# Altium PCB ltk-hall-main.PcbDoc
Units mm, origin at the board's own origin, x right, y up, seen from the top; angles counter-clockwise.
Board outline 100 x 100 mm, 2 copper layers (Top Layer, Bottom Layer), stack 1.56 mm thick; 114 components, 91 nets, 428 pads, 0 vias.
Unrouted connection lines stored in the file: 294.
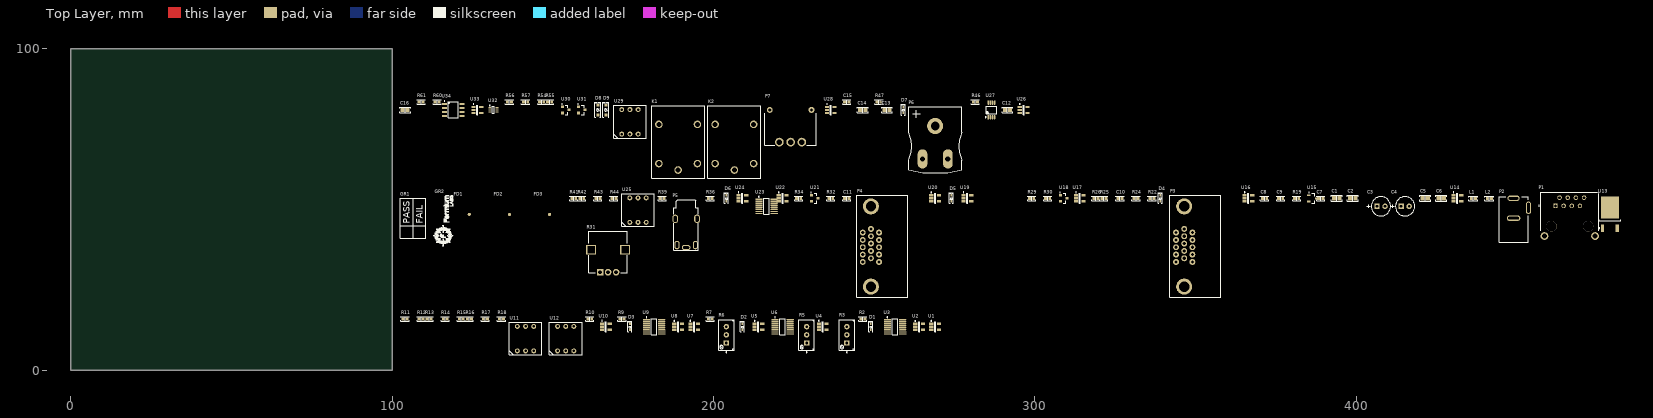
[diagram p0: Top Layer view]
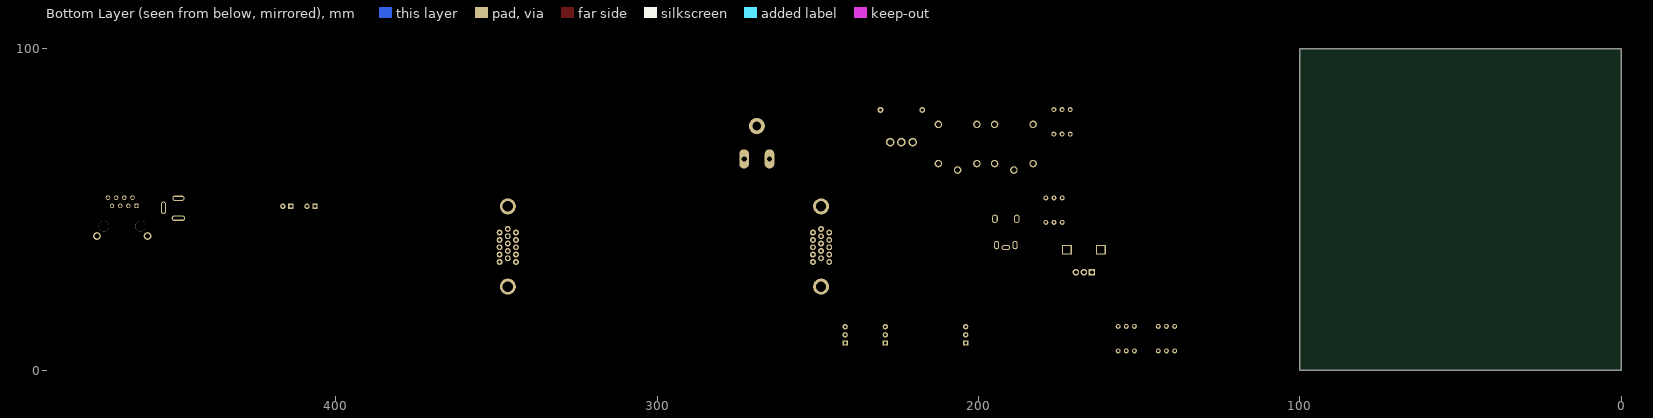
[diagram p1: Bottom Layer view, seen from below]

## Layer stack, top to bottom
Top Solder: solder mask 0.02, Solder Resist, Dk 3.5
Top Layer: signal copper 0.03
Dielectric 1: dielectric 1.5, FR-4, Dk 4.8
Bottom Layer: signal copper 0.03
Bottom Solder: solder mask 0.02, Solder Resist, Dk 3.5

## Board outline
0,0 100,0 100,100 0,100

## Design rules (kind name [scope] priority, off if disabled: settings)
AcuteAngle [All] p1: minimum=6.00000000000000E+0001 checktracksonly=TRUE
AssemblyTestPointUsage [(not InNetClass('NOTESTPOINTS'))] p1: allowmultiple=TRUE
AssemblyTestPointUsage AssemblyTestPointUsageN [InNetClass('NOTESTPOINTS')] p2: valid=2 allowmultiple=TRUE
AssemblyTestpoint [All] p1: testpointundercomponent=TRUE minsize=0.8 maxsize=2 preferedsize=1 minholesize=0 maxholesize=0.35 preferedholesize=0 testpointgrid=1.27 usegrid=FALSE gridoriginx=87.5 gridoriginy=62.5 gridtolerance=0 allowsidetop=TRUE minspacing=2.54 // Zollner
BoardOutlineClearance BoardCopperOutlineClearance [(OnLayer('Top Layer') OR OnLayer('Bottom Layer') )] p1: gap=0.5 ignorepadtopadclearanceinfootprint=FALSE except(1: Poly-OutlineEdge Region-OutlineEdge; 1.5: SMDPad-OutlineEdge THPad-OutlineEdge)
Clearance PadToViaClearance [IsVia and not IsComponentVia vs IsPad] p1: gap=0.025 ignorepadtopadclearanceinfootprint=TRUE
Clearance "Clearance NOTSELV-SELV" [InNetClass('NOTSELV') vs NOT InNetClass('NOTSELV')] p2: gap=6 ignorepadtopadclearanceinfootprint=FALSE // according to previous calio PCB
Clearance "Clearance (FAB)" [All] p3: gap=0.203 ignorepadtopadclearanceinfootprint=TRUE except(0.305: Arc-Poly Track-Poly SMDPad-Poly THPad-Poly Via-Poly Fill-Poly Poly-Poly)
ComponentClearance ComponentClearance_NetTie [((ObjectKind = 'Component') And (ComponentType = 'Net Tie')) Or (Footprint = 'StarPoint') Or (Footprint like 'NetTieVia*')] p1: gap=-3.81 collisioncheckmode=3 verticalgap=-3.81 showdistances=FALSE
ComponentClearance [All] p2: gap=0.254 collisioncheckmode=3 verticalgap=0.254 showdistances=FALSE
DiffPairsRouting [All] p1: maxlimit=1.27 minlimit=0.203 mostfreqgap=0.203 toplayer_minwidth=0.152 toplayer_maxwidth=2.54 toplayer_prefwidth=0.254 bottomlayer_minwidth=0.152 bottomlayer_maxwidth=2.54 bottomlayer_prefwidth=0.254 maxuncoupledlength=12.7
FabricationTestPointUsage [All] p1: valid=2 allowmultiple=FALSE
FabricationTestpoint [All] p1: side=3 testpointundercomponent=TRUE minsize=1.016 maxsize=2.54 preferedsize=1.524 minholesize=0 maxholesize=1.016 preferedholesize=0.813 testpointgrid=0.025 allowsidetop=TRUE allowsidebottom=TRUE usegrid=FALSE gridtolerance=0
HoleSize [All] p1: absolutevalues=TRUE maxlimit=6.35 minlimit=0.3 maxpercent=80.000 minpercent=20.000 // Zollner
HoleToHoleClearance HoleToHoleClearance_NetTieVia [InPadClass('NetTieVias') vs InPadClass('NetTieVias')] p1: gap=0 allowstackedmicrovias=TRUE
HoleToHoleClearance [All] p2: gap=0.25 allowstackedmicrovias=TRUE // Zollner
MinimumAnnularRing [All] p1: minimumring=0.15 // PCBWAY
MinimumSolderMaskSliver [All] p1: minsoldermaskwidth=0.2 // Zollner
PlaneClearance PlaneClearance_1 [All] p1: clearance=0.508
PlaneConnect [All] p1: pad.planeconnectstyle=Relief pad.reliefexpansion=0.508 pad.reliefentries=4 pad.reliefconductorwidth=0.254 pad.reliefairgap=0.254 via.planeconnectstyle=Direct via.reliefexpansion=0.508 via.reliefentries=4 via.reliefconductorwidth=0.254 via.reliefairgap=0.254
PolygonConnect [All] p1: thpad.connectstyle=Relief thpad.reliefconductorwidth=0.254 thpad.reliefentries=4 thpad.polygonreliefangle="90 Angle" thpad.airgapwidth=0.254 smdpad.connectstyle=Relief smdpad.reliefconductorwidth=0.254 smdpad.reliefentries=4 smdpad.polygonreliefangle="90 Angle" smdpad.airgapwidth=0.254 via.connectstyle=Direct via.reliefconductorwidth=0.254 via.reliefentries=4 via.polygonreliefangle="90 Angle" via.airgapwidth=0.254
RoomDefinition temperature [InComponentClass('temperature')] p1: confinementstyle=ConfineIn formatcopy=TRUE lockcomponents=FALSE outline 101.5,58.5 301.5,58.5 301.5,88.5 101.5,88.5
RoomDefinition ltk-hall-main [InComponentClass('ltk-hall-main')] p2: confinementstyle=ConfineIn formatcopy=TRUE lockcomponents=FALSE outline 101.5,21 484,21 484,58.5 101.5,58.5
RoomDefinition input_vhall [InComponentClass('input_vhall')] p3: confinementstyle=ConfineIn formatcopy=TRUE lockcomponents=FALSE outline 101.5,3.5 274,3.5 274,21 101.5,21
RoutingVias [All] p1: holewidth=0.35 width=0.7 viastyle="Through Hole" minholewidth=0.3 minwidth=0.6 maxholewidth=1.27 maxwidth=1.27
SMDEntry [not IsTestpoint] p1: side=TRUE corner=TRUE anyangle=FALSE
SMDNeckDown [not IsTestpoint] p1: percent=90.000
SMDToCorner [All] p1: distance=10000
SMDToPlane [All] p1: distance=0
ShortCircuit [All vs not IsBoardCutoutRegion] p1: allowed=FALSE
SilkToSolderMaskClearance [IsPad] p1: minsilkscreentomaskgap=0.127 clearancetoexposedcopper=TRUE
SolderMaskExpansion [All] p1: expansion=0.05 // Zollner
SolderMaskExpansion SolderMaskExpansionToHoles [All] p2: expansion=0.1 soldermaskfromhole=TRUE // Zollner
UnRoutedNet [All] p1: checkbadconnections=TRUE
Width [All] p1: maxlimit=12.7 minlimit=0.203 preferedwidth=0.254
16 further rules are at their usual default settings.

## Classes and differential pairs
component class temperature: C12 C13 C14 C15 C16 D7 D8 D9 K1 K2 P6 P7 R45 R46 R47 R48 R49 R50 R51 R52 R53 R54 R55 R56 R57 R58 R59 R60 R61 U26 U27 U28 U29 U30 U31 U32 U33 U34
component class ltk-hall-main: C1 C2 C3 C4 C5 C6 C7 C8 C9 C10 C11 D4 D5 D6 FD1 FD2 FD3 GR1 GR2 L1 L2 P1 P2 P3 P4 P5 R19 R20 R21 R22 R23 R24 R25 R26 R27 R28 R29 R30 R31 R32 R33 R34 R35 R36 R37 R38 R39 R40 R41 R42 R43 R44 U13 U14 U15 U16 U17 U18 U19 U20 U21 U22 U23 U24 U25
component class input_vhall: D1 D2 D3 R1 R2 R3 R4 R5 R6 R7 R8 R9 R10 R11 R12 R13 R14 R15 R16 R17 R18 U1 U2 U3 U4 U5 U6 U7 U8 U9 U10 U11 U12

## Components (designator, comment, footprint, x,y, rotation, side; value= is the part's Value field where it differs from the comment)
C1 "22uF" "CAP 0805_2012" 394,53.5 r0 top
C2 "22uF" "CAP 0805_2012" 399,53.5 r0 top
C3 "220uF" 3924B366-8672-45E9-B0BE-62DACC24E783 406.5,51 r0 top
C4 "220uF" 3924B366-8672-45E9-B0BE-62DACC24E783 414,51 r0 top
C5 "22uF" "CAP 0805_2012" 421.5,53.5 r0 top
C6 "22uF" "CAP 0805_2012" 426.5,53.5 r0 top
C7 "100nF" "CAP 0603_1608" 389,53.5 r0 top
C8 "100nF" "CAP 0603_1608" 371.5,53.5 r0 top
C9 "100nF" "CAP 0603_1608" 376.5,53.5 r0 top
C10 "100pF" "CAP 0603_1608" 326.5,53.5 r0 top
C11 "100pF" "CAP 0603_1608" 241.5,53.5 r0 top
C12 "10uF" "CAP 0805_2012" 291.5,81 r0 top
C13 "10uF" "CAP 0805_2012" 254,81 r0 top
C14 "10uF" "CAP 0805_2012" 246.5,81 r0 top
C15 "100nF" "CAP 0603_1608" 241.5,83.5 r0 top
C16 "10uF" "CAP 0805_2012" 104,81 r0 top
D1 "5V" SOD523F 249,13.5 r90 top
D2 "5V" SOD523F 209,13.5 r90 top
D3 "5V" SOD523F 174,13.5 r90 top
D4 "5V" SOD523F 339,53.5 r90 top
D5 "5V" SOD523F 274,53.5 r90 top
D6 "5V" SOD523F 204,53.5 r90 top
D7 "5V" SOD523F 259,81 r90 top
D8 "1N4148W-TP" SOD-123 164,81 r90 top
D9 "1N4148W-TP" SOD-123 166.5,81 r90 top
FD1 "IPC-7351A FIDUCIAL" FIDUCIAL-IPC-7351A 124,48.5 r0 top
FD2 "IPC-7351A FIDUCIAL" FIDUCIAL-IPC-7351A 136.5,48.5 r0 top
FD3 "IPC-7351A FIDUCIAL" FIDUCIAL-IPC-7351A 149,48.5 r0 top
GR1 "PASS-FAIL" 0B1556B7-A534-4801-B57D-01EFA34B1205 106.5,41 r90 top
GR2 "FermiumLABS logo" 5394DE47-A0E8-4329-8464-7791B7C19310 119,38.5 r90 top
K1 "G5LE-14-DC12" AAE46D0F-8D2F-4914-8614-C04E242B4758 189,71 r90 top
K2 "G5LE-14-DC12" AAE46D0F-8D2F-4914-8614-C04E242B4758 206.5,71 r90 top
L1 "MPZ1608S102ATA00" "FER 0603_1608" 436.5,53.5 r0 top
L2 "MPZ1608S102ATA00" "FER 0603_1608" 441.5,53.5 r0 top
P1 "5555153-1" 03FA2727-72E9-446E-856D-3DD573B1EBDD 466.5,46 r0 top
P2 "DC-005A-20A" F0972D8A-C5C0-4A84-836D-A9666EE65C2D 449,53.5 r90 top
P3 "ICD15S13E4GV00LF" 66D8AC91-DC10-42D3-BF25-693004815827 346.5,38.5 r90 top
P4 "ICD15S13E4GV00LF" 66D8AC91-DC10-42D3-BF25-693004815827 249,38.5 r90 top
P5 "FC68125" 977BFFC7-4CFC-4119-A8B4-AB88E5A1DB2B 191.5,48.5 r0 top
P6 "IM-K-PCB" 9044FB30-693E-4780-9B0B-95C5421D70E8 269,76 r0 top
P7 "MR30PW-M" B3F23392-877C-4EEC-B1AF-B260E8D92153 224,71 r0 top
R2 "0" "RES 0603_1608" 246.5,16 r0 top
R3 "50K 25t" F9540903-09ED-4909-856A-DED10E64451E 241.5,11 r90 top
R5 "10K 25t" F9540903-09ED-4909-856A-DED10E64451E 229,11 r90 top
R6 "50K 25t" F9540903-09ED-4909-856A-DED10E64451E 204,11 r90 top
R7 "0" "RES 0603_1608" 199,16 r0 top
R9 "0" "RES 0603_1608" 171.5,16 r0 top
R10 "0" "RES 0603_1608" 161.5,16 r0 top
R11 "10K" "RES 0603_1608" 104,16 r0 top
R12 "10K" "RES 0603_1608" 109,16 r0 top
R13 "10K" "RES 0603_1608" 111.5,16 r0 top
R14 "10K" "RES 0603_1608" 116.5,16 r0 top
R15 "10K" "RES 0603_1608" 121.5,16 r0 top
R16 "10K" "RES 0603_1608" 124,16 r0 top
R17 "10K" "RES 0603_1608" 129,16 r0 top
R18 "10K" "RES 0603_1608" 134,16 r0 top
R19 "1K" "RES 0603_1608" 381.5,53.5 r0 top
R22 "0" "RES 0603_1608" 336.5,53.5 r0 top
R24 "10 0.1%" "RES 0603_1608" 331.5,53.5 r0 top
R25 "10K" "RES 0603_1608" 321.5,53.5 r0 top
R26 "1K" "RES 0603_1608" 319,53.5 r0 top
R29 "1K" "RES 0603_1608" 299,53.5 r0 top
R30 "1K" "RES 0603_1608" 304,53.5 r0 top
R31 "10K LIN" 2EF88547-EDEF-4A49-A522-C215618D4BC7 167.2,30.5 r0 top
R32 "10 0.1%" "RES 0603_1608" 236.5,53.5 r0 top
R34 "10K" "RES 0603_1608" 226.5,53.5 r0 top
R36 "1K" "RES 0603_1608" 199,53.5 r0 top
R39 "1K" "RES 0603_1608" 184,53.5 r0 top
R41 "10K" "RES 0603_1608" 156.5,53.5 r0 top
R42 "10K" "RES 0603_1608" 159,53.5 r0 top
R43 "10K" "RES 0603_1608" 164,53.5 r0 top
R44 "10K" "RES 0603_1608" 169,53.5 r0 top
R46 "10K" "RES 0603_1608" 281.5,83.5 r0 top
R47 "10K" "RES 0603_1608" 251.5,83.5 r0 top
R54 "10K" "RES 0603_1608" 146.5,83.5 r0 top
R55 "10K" "RES 0603_1608" 149,83.5 r0 top
R56 "10K" "RES 0603_1608" 136.5,83.5 r0 top
R57 "10K" "RES 0603_1608" 141.5,83.5 r0 top
R60 "10K" "RES 0603_1608" 114,83.5 r0 top
R61 "10K" "RES 0603_1608" 109,83.5 r0 top
U1 "AD8605ARTZ" A3DDA0BC-073E-4B18-9613-F713A7EC1E27 269,13.5 r0 top
U2 "AD8605ARTZ" A3DDA0BC-073E-4B18-9613-F713A7EC1E27 264,13.5 r0 top
U3 "LTC6915CGN#PBF" 517EE8A2-9FD8-4174-996D-BDBF76CA3EEB 256.5,13.5 r0 top
U4 "AD8605ARTZ" A3DDA0BC-073E-4B18-9613-F713A7EC1E27 234,13.5 r0 top
U5 "AD8605ARTZ" A3DDA0BC-073E-4B18-9613-F713A7EC1E27 214,13.5 r0 top
U6 "LTC6915CGN#PBF" 517EE8A2-9FD8-4174-996D-BDBF76CA3EEB 221.5,13.5 r0 top
U7 "AD8605ARTZ" A3DDA0BC-073E-4B18-9613-F713A7EC1E27 194,13.5 r0 top
U8 "AD8605ARTZ" A3DDA0BC-073E-4B18-9613-F713A7EC1E27 189,13.5 r0 top
U9 "LTC6915CGN#PBF" 517EE8A2-9FD8-4174-996D-BDBF76CA3EEB 181.5,13.5 r0 top
U10 "AD8605ARTZ" A3DDA0BC-073E-4B18-9613-F713A7EC1E27 166.5,13.5 r0 top
U11 "A6R-162RS" 2599C238-5645-4A8C-8BF9-C7515FACCFA0 141.5,6 r0 top
U12 "A6R-162RS" 2599C238-5645-4A8C-8BF9-C7515FACCFA0 154,6 r0 top
U13 "L78M05ABDT-TR" 4BDA507D-BB70-4009-B963-85AD90086B51 479,48.5 r90 top
U14 "AD8605ARTZ" A3DDA0BC-073E-4B18-9613-F713A7EC1E27 431.5,53.5 r0 top
U15 "REF3025AIDBZR" "TI SOT-23-3 DBZ" 386.5,53.5 r0 top
U16 "AD8605ARTZ" A3DDA0BC-073E-4B18-9613-F713A7EC1E27 366.5,53.5 r0 top
U17 "AD8605ARTZ" A3DDA0BC-073E-4B18-9613-F713A7EC1E27 314,53.5 r0 top
U18 "2N7002K" "ON SEMI SOT-23-3" 309,53.5 r0 top
U19 "AD8605ARTZ" A3DDA0BC-073E-4B18-9613-F713A7EC1E27 279,53.5 r0 top
U20 "AD8605ARTZ" A3DDA0BC-073E-4B18-9613-F713A7EC1E27 269,53.5 r0 top
U21 "2N7002K" "ON SEMI SOT-23-3" 231.5,53.5 r0 top
U22 "AD8605ARTZ" A3DDA0BC-073E-4B18-9613-F713A7EC1E27 221.5,53.5 r0 top
U23 "LTC6915CGN#PBF" 517EE8A2-9FD8-4174-996D-BDBF76CA3EEB 216.5,51 r0 top
U24 "AD8605ARTZ" A3DDA0BC-073E-4B18-9613-F713A7EC1E27 209,53.5 r0 top
U25 "A6R-162RS" 2599C238-5645-4A8C-8BF9-C7515FACCFA0 176.5,46 r0 top
U26 "AD8605ARTZ" A3DDA0BC-073E-4B18-9613-F713A7EC1E27 296.5,81 r0 top
U27 "AD8495ARMZ-R7" "ANALOG MSOP-8 RM-8" 286.5,81 r90 top
U28 "AD8605ARTZ" A3DDA0BC-073E-4B18-9613-F713A7EC1E27 236.5,81 r0 top
U29 "A6R-162RS" 2599C238-5645-4A8C-8BF9-C7515FACCFA0 174,73.5 r0 top
U30 "2N7002K" "ON SEMI SOT-23-3" 154,81 r0 top
U31 "2N7002K" "ON SEMI SOT-23-3" 159,81 r0 top
U32 "NC7SZ58P6X" CF792C6F-51F3-4C59-9918-AD84EFC14FA6 131.5,81 r0 top
U33 "AD8605ARTZ" A3DDA0BC-073E-4B18-9613-F713A7EC1E27 126.5,81 r0 top
U34 "NE555DR" "TI SOIC-8 D" 119,81 r0 top

## Footprints (in the part's own frame and the unit in brackets; to place one, negate y for a bottom-side part, rotate by r counter-clockwise, add the part's x,y. Pads: shape width x height; smd on the part's side, far side on the other; paste and mask are expansions set on the pad)
0B1556B7-A534-4801-B57D-01EFA34B1205 [mm]
  silkscreen extent 0,-4 12.5,4
2EF88547-EDEF-4A49-A522-C215618D4BC7 [mm]
  rect 2.05x2.05 hole 1.2: 1(-2.5,0)
  round 2.05 hole 1.2: 2(0,0) 3(2.5,0)
  rect 3.05x2.85 hole 2.2 square: 4(-5.3,7) 4(5.3,7)
  silkscreen extent -6,-0.25 6,12.75, body extent -5.7,-0.15 5.7,12.5, height 14.89
03FA2727-72E9-446E-856D-3DD573B1EBDD [mm]
  rect 1.39x1.39 hole 0.89 paste-1000 mask+0: 1(-4.445,5.145)
  round 1.39 hole 0.89 paste-1000 mask+0: 2(-3.175,7.685) 3(-1.905,5.145) 4(-0.635,7.685) 5(0.635,5.145) 6(1.905,7.685) 7(3.175,5.145) 8(4.445,7.685)
  round 2.42 hole 1.57 paste-1000 mask+0: 9(-7.875,-4.255) 10(7.875,-4.255)
  round 3.25 hole 3.25 unplated paste-1000 mask+0: ""(-5.715,-1.205) ""(5.715,-1.205)
  silkscreen extent -9.68,-2.67 8.96,9.34, body extent -9.19,-9.44 9.19,9.44, height 0.25
4BDA507D-BB70-4009-B963-85AD90086B51 [mm]
  rect 2.4x1 smd: 1(-4.3,2.28) 3(-4.3,-2.28)
  rect 6.8x5.55 smd: 4(2.1,0)
  silkscreen extent -4.42,-3.3 -1.7,3.45, body extent -4.95,-3.37 5.15,3.37, height 2.37
66D8AC91-DC10-42D3-BF25-693004815827 [mm]
  round 1.85 hole 1: 1(4.325,2.54) 2(2.04,2.54) 3(-0.245,2.54) 4(-2.53,2.54) 5(-4.815,2.54) 6(5.467,0) 7(3.182,0) 8(0.897,0) 9(-1.388,0) 10(-3.672,0) 11(4.325,-2.54) 12(2.04,-2.54) 13(-0.245,-2.54) 14(-2.53,-2.54) 15(-4.815,-2.54)
  round 5 hole 3.2: 16(-12.495,0) 17(12.495,0)
  silkscreen extent -15.88,-11.43 15.88,4.45, body extent -15.49,-17.53 15.51,4.1, height 12.55
517EE8A2-9FD8-4174-996D-BDBF76CA3EEB [mm]
  oval 2.25x0.4 smd: 1(-2.375,2.222) 2(-2.375,1.587) 3(-2.375,0.953) 4(-2.375,0.318) 5(-2.375,-0.318) 6(-2.375,-0.953) 7(-2.375,-1.587) 8(-2.375,-2.222) 9(2.375,-2.222) 10(2.375,-1.587) 11(2.375,-0.953) 12(2.375,-0.318) 13(2.375,0.318) 14(2.375,0.953) 15(2.375,1.587) 16(2.375,2.222)
  silkscreen extent -2.5,-2.5 0.85,3.1, body extent -3.13,-2.5 3.13,2.5, height 1.75
977BFFC7-4CFC-4119-A8B4-AB88E5A1DB2B [mm]
  oval 2.65x1.65 hole 0.8 slot 1.8 at 0 deg: 1(0,-10.338)
  oval 1.65x2.65 hole 0.8 slot 1.8 at 90 deg: 2(2.87,-9.55) 6(-2.87,-9.55)
  oval 1.85x2.65 hole 1 slot 1.8 at 90 deg: 3(-3.404,-1.397) 3(3.404,-1.397)
  round 0 hole 1.2 unplated: ""(0,-7.01) ""(0,0)
  silkscreen extent -3.89,-11.18 3.73,4.57, body extent -3.7,-10.6 3.7,4.5, height 5.99
2599C238-5645-4A8C-8BF9-C7515FACCFA0 [mil]
  round 60 hole 30: 1(-100,0) 2(100,300) 4(100,0) 8(-100,300) C(0,0) C(0,300)
  silkscreen extent -200,-50 200,350, body extent -193,-45 193,345, height 465
3924B366-8672-45E9-B0BE-62DACC24E783 [mm]
  rect 1.7x1.7 hole 0.85: 1(0,0)
  round 1.7 hole 0.85: 2(2.5,0)
  silkscreen extent -3.13,-3 4.25,3, body extent -1.9,-3.15 4.4,3.15, height 11
5394DE47-A0E8-4329-8464-7791B7C19310 [mm]
  silkscreen extent 0.02,0.02 15.9,6.02
9044FB30-693E-4780-9B0B-95C5421D70E8 [mm]
  oval 3x6 hole 1.65: 1(-3.95,-10.25) 2(3.95,-10.25)
  round 5 hole 2.7: NC(0,0)
  silkscreen extent -8.3,-14.51 8.3,5.99, body extent -8.3,-14.5 8.3,6, height 8
A3DDA0BC-073E-4B18-9613-F713A7EC1E27 [mm]
  rect 1.3x0.7 smd: 1(-1.2,0.95) 2(-1.2,0) 3(-1.2,-0.95) 4(1.2,-0.95) 5(1.2,0.95)
  silkscreen extent -1.32,-1.5 0.15,1.97, body extent -1.25,-1.5 1.25,1.5, height 1.1
AAE46D0F-8D2F-4914-8614-C04E242B4758 [mm]
  round 2.35 hole 1.55: C(-8.7,0) L1(-6.7,6) L2(-6.7,-6) NC(5.5,-6) NO(5.5,6)
  silkscreen extent -11.24,-8.25 11.25,8.25, body extent -11.25,-8.25 11.25,8.25, height 19
"ANALOG MSOP-8 RM-8" [mm]
  oval 1.35x0.5 smd: 1(-2.275,0.975) 2(-2.275,0.325) 3(-2.275,-0.325) 4(-2.275,-0.975) 5(2.275,-0.975) 6(2.275,-0.325) 7(2.275,0.325) 8(2.275,0.975)
  silkscreen extent -2.4,-1.6 1.2,1.9, body extent -2.46,-1.5 2.46,1.5, height 1.1
B3F23392-877C-4EEC-B1AF-B260E8D92153 [mm]
  round 1.85 hole 1: 0(-6.5,10) 0(6.5,10)
  round 2.7 hole 1.7: 1(-3.5,0) 2(0,0) 3(3.5,0)
  silkscreen extent -8,-1 8,9, body extent -7.65,-0.9 7.65,13.05, height 4.95
"CAP 0603_1608" [mm] "Chip Capacitor, 2-Leads, Body 1.60x0.80mm, IPC Medium Density"
  rect 0.9x1 smd: 1(-0.675,0) 2(0.675,0)
  silkscreen extent -1.27,-0.7 1.27,0.7, body extent -0.8,-0.41 0.8,0.41, height 0.82
"CAP 0805_2012" [mm] "Chip Capacitor, 2-Leads, Body 2.00x1.20mm, IPC Medium Density"
  rect 1.3x1.4 smd: 1(-0.8,0) 2(0.8,0)
  silkscreen extent -1.7,-0.9 1.7,0.9, body extent -1,-0.64 1,0.64, height 1.26
CF792C6F-51F3-4C59-9918-AD84EFC14FA6 [mm]
  rect 0.85x0.4 smd: 1(-1.125,0.65) 2(-1.125,0) 3(-1.125,-0.65) 4(1.125,-0.65) 5(1.125,0) 6(1.125,0.65)
  silkscreen extent -1.25,-1.1 0.3,1.52, body extent -1.14,-1 1.14,1, height 0.94
F0972D8A-C5C0-4A84-836D-A9666EE65C2D [mm]
  oval 1.65x3.85 hole 0.8 slot 3 at 90 deg: 1(0,0)
  oval 1.65x4.2 hole 0.8 slot 3.35 at 90 deg: 2(-6.2,0)
  oval 3.85x1.65 hole 0.8 slot 3 at 0 deg: 3(-2.95,-4.65)
  silkscreen extent -13.7,-4.5 0.5,4.5, body extent -13.67,-4.75 0.43,4.55, height 10.9
F9540903-09ED-4909-856A-DED10E64451E [mm]
  rect 1.65x1.65 hole 0.8: 1(-2.54,0)
  round 1.65 hole 0.8: 2(0,0) 3(2.54,0)
  silkscreen extent -5.54,-2.41 4.76,2.42, body extent -4.76,-2.4 4.76,2.42, height 11.55
"FER 0603_1608" [mm] "Chip Ferrite, 2-Leads, Body 1.60x0.80mm, IPC Medium Density"
  rect 0.9x1 smd: 1(-0.675,0) 2(0.675,0)
  silkscreen extent -1.4,-0.7 1.4,0.7, body extent -0.8,-0.41 0.8,0.41, height 0.82
FIDUCIAL-IPC-7351A [mm]
  round 1 smd paste-2.54 mask+1: 5(0,0)
  Top Layer pour cut-out: 0,-1.5 -0.574,-1.386 -1.061,-1.061 -1.386,-0.574 -1.5,0 -1.5,0 -1.386,0.574 -1.061,1.061 -0.574,1.386 0,1.5 0,1.5 0.574,1.386 1.061,1.061 1.386,0.574 1.5,0 1.5,0 1.386,-0.574 1.061,-1.061 0.574,-1.386 0,-1.5
"ON SEMI SOT-23-3" [mm] "SOT23, 3-Leads, Body 2.90x2.40mm, Pitch 0.95mm, IPC Medium Density"
  rect 0.9x0.8 smd: 1(-1,0.95) 2(1,0) 3(-1,-0.95)
  silkscreen extent -1.27,-1.5 0.7,1.95, body extent -1.16,-1.45 1.16,1.45, height 1
"RES 0603_1608" [mm] "Chip Resistor, 2-Leads, Body 1.60x0.80mm, IPC Medium Density"
  rect 0.85x0.95 smd: 1(-0.65,0) 2(0.65,0)
  silkscreen extent -1.27,-0.7 1.27,0.7, body extent -0.8,-0.4 0.8,0.4, height 0.45
SOD523F [mm] "SODFL, 2-Leads, Body 0.80x1.60mm, IPC Medium Density"
  rect 0.8x0.5 smd: 1(0.9,0) 2(-0.9,0)
  silkscreen extent -1.6,-0.64 1.8,0.64, body extent -0.8,-0.4 0.8,0.4, height 0.65
SOD-123 [mm] "SOD, 2-Leads, Body 1.55x3.70mm, IPC Medium Density"
  rect 0.9x0.95 smd: 1(1.575,0) 2(-1.575,0)
  silkscreen extent -2.3,-0.92 2.41,0.92, body extent -1.86,-0.78 1.86,0.77, height 1.35
"TI SOIC-8 D" [mm] "SOP, 8-Leads, Body 4.90x3.90mm, Pitch 1.27mm, IPC Medium Density"
  rect 1.55x0.6 smd: 1(-2.7,1.905) 2(-2.7,0.635) 3(-2.7,-0.635) 4(-2.7,-1.905) 5(2.7,-1.905) 6(2.7,-0.635) 7(2.7,0.635) 8(2.7,1.905)
  silkscreen extent -2.82,-2.5 1.6,2.88, body extent -3.01,-2.45 3.01,2.45, height 1.5
"TI SOT-23-3 DBZ" [mm] "SOT23, 3-Leads, Body 2.92x2.37mm, Pitch 0.95mm, IPC Medium Density"
  rect 1.05x0.6 smd: 1(-1.185,0.95) 2(-1.185,-0.95) 3(1.185,0)
  silkscreen extent -1.31,-1.5 0.7,1.92, body extent -1.32,-1.52 1.32,1.52, height 1.12

## Part data
C1 C2 C5 C6: library part 4e18e584-a077-4dfe-b9da-5e528e787323, "CAP SMD MLCC 22uF 25V 0805 X5R", Manufacturer 1="Samsung Electro-Mechanics", Manufacturer 2=Murata, Manufacturer Part Number 1=CL21A106KAYNNNE, Manufacturer Part Number 2=GRM21BR61E106KA73L, id=14817, Part Number=4e18e584-a077-4dfe-b9da-5e528e787323
C3 C4: library part 1a28df19-6d3e-4a71-836c-f22920f8e8ab, "CAP  THT ELEC 220uF 25V 20%", Manufacturer 1=Rubycon, Manufacturer Part Number 1=25PK220MEFC-6.3*11, ComponentLink1Description=Datasheet, ComponentLink1URL="http://localhost:8080/static/files/Rubycon-220uF-25V_C109337_12019-03-10_214953.757848.pdf?Rubycon-220uF-25V_C109337 (1).pdf", id=14782, Part Number=1a28df19-6d3e-4a71-836c-f22920f8e8ab
C7 C8 C9 C15: library part 02841f84-ac15-41b5-9e17-915f8f067828, "CAP SMD MLCC 100nF 25V 0603 X7R", Manufacturer 1="Samsung Electro-Mechanics", Manufacturer Part Number 1=CL10B104KA8NNNC, ComponentLink1Description=Datasheet, ComponentLink1URL=http://localhost:8080/static/files/Samsung-Electro-Mechanics-CL10B104KA8NNNC_C15902019-03-10_215548.826887.pdf?Samsung-Electro-Mechanics-CL10B104KA8NNNC_C1590.pdf, id=14784, Part Number=02841f84-ac15-41b5-9e17-915f8f067828
C10 C11: library part ccf679fd-1b09-4431-be81-04c3ce295510, "CAP SMD MLCC 100pF 100V 0603 C0G/NP0", Manufacturer 1=Yageo, Manufacturer Part Number 1=CC0603JRNPO0BN101, id=14804, Part Number=ccf679fd-1b09-4431-be81-04c3ce295510
C12 C13 C14 C16: library part 1ffbe5a9-0884-4740-bdad-20a6a98400e6, "CAP SMD MLCC 10uF 25V 0805 X5R", Manufacturer 1="Samsung Electro-Mechanics", Manufacturer 2=Murata, Manufacturer Part Number 1=CL21A106KAYNNNE, Manufacturer Part Number 2=GRM21BR61E106KA73L, ComponentLink1Description=Datasheet, ComponentLink1URL=http://localhost:8080/static/files/Samsung-Electro-Mechanics-CL21A106KAYNNNE_C158502019-03-10_213827.610739.pdf?Samsung-Electro-Mechanics-CL21A106KAYNNNE_C15850.pdf, id=14779, Part Number=1ffbe5a9-0884-4740-bdad-20a6a98400e6
D1 D2 D3 D4 D5 D6 D7: library part daa58212-38e2-4326-a156-8e48058c46f1, "DIODE SMD TVS 5V BIDIRECTIONAL SOD-523", Manufacturer 1="Born Semiconductor", Manufacturer 2=Nexperia, Manufacturer Part Number 1=PESD5V0S1BBN, Manufacturer Part Number 2=PESD5V0S1BB,115, ComponentLink1Description=Datasheet, ComponentLink1URL=http://localhost:8080/static/files/Nexperia-PESD5V0S1BB-115_C976402019-08-16_201905.624024.pdf?Nexperia-PESD5V0S1BB-115_C97640.pdf, ComponentLink2Description=Datasheet, ComponentLink2URL=http://localhost:8080/static/files/1901051701_Bourne-Semicon-Shenzhen-PESD5V0S1BBN_C3142642019-08-16_201911.992552.pdf?1901051701_Bourne-Semicon-Shenzhen-PESD5V0S1BBN_C314264.pdf, id=14837, Part Number=daa58212-38e2-4326-a156-8e48058c46f1
D8 D9: library part 5e920700-75df-48e3-84dd-8f9f777caed8, "DIODE SMD 100V 150mA 1.5Vf SOD-123 4148", Manufacturer 1=MCC, ComponentLink1Description=Datasheet, ComponentLink1URL=http://localhost:8080/static/files/Micro-Commercial-Components-MCC-1N4148W-TP_C779782019-04-06_215019.428643.pdf?Micro-Commercial-Components-MCC-1N4148W-TP_C77978.pdf, id=14795, Manufacturer Part Number 1=1N4148W-TP, Part Number=5e920700-75df-48e3-84dd-8f9f777caed8
FD1 FD2 FD3: library part 19da4612-eb95-43bb-9984-553a52b2a224, "GRAPHICS FIDUCIAL IPC-7351A", id=14800, Part Number=19da4612-eb95-43bb-9984-553a52b2a224
GR1: library part d1abe19f-3fed-4f20-b2ed-afc0ffbc6628, "GRAPHICS PASS-FAIL MARK", id=14801, Part Number=d1abe19f-3fed-4f20-b2ed-afc0ffbc6628
GR2: library part 50f8ea88-0034-49fe-a263-d8e97bc35e2f, "GRAPHICS LOGO FERMIUM LABS SRL", id=14799, Part Number=50f8ea88-0034-49fe-a263-d8e97bc35e2f
K1 K2: library part daf6f3cd-58c4-4886-bcb7-b7b47a76ae08, "RELAY SPDT 10A 250VAC 12VDC SUBMINIATURE", Manufacturer 1=Omron, ComponentLink1Description=Datasheet, ComponentLink1URL="http://localhost:8080/static/files/Omron-Electronics-G5LE-14-DC12_C116964_12019-08-16_200915.378527.pdf?Omron-Electronics-G5LE-14-DC12_C116964 (1).pdf", id=14836, Manufacturer Part Number 1=G5LE-14-DC12, Part Number=daf6f3cd-58c4-4886-bcb7-b7b47a76ae08
L1 L2: library part a4b2e015-bf25-47b8-954c-a5b040744a3a, "FER SMD CHIP 0603 800mA 1K@100MHz 300mOhm", Manufacturer 1=TDK, ComponentLink1Description=Datasheet, ComponentLink1URL=http://localhost:8080/static/files/TDK-MPZ1608S102ATA00_C768142019-08-18_021255.210641.pdf?TDK-MPZ1608S102ATA00_C76814.pdf, id=14850, Manufacturer Part Number 1=MPZ1608S102ATA00, Part Number=a4b2e015-bf25-47b8-954c-a5b040744a3a
P1: library part f401b84a-9695-45b1-951e-00bef0039069, "CONN RJ45 SHIELDED", Manufacturer 1="TE Connectivity", ComponentLink1Description="Product Page", ComponentLink1URL=https://www.te.com/usa-en/product-5555153-1.html?te_campaign=oct_glo_manufacturer&elqCampaignId=26136&te_bu=Cor&te_type=other, ComponentLink2Description=Datasheet, ComponentLink2URL=http://localhost:8080/static/files/TE-Connectivity-5555153-1_C1250722019-08-17_152708.984028.pdf?TE-Connectivity-5555153-1_C125072.pdf, ComponentLink3Description="3D Model", ComponentLink3URL=http://localhost:8080/static/files/ENG_CVM_CVM_5555153-1_C.3d_stp2019-08-17_152716.824354.zip?ENG_CVM_CVM_5555153-1_C.3d_stp.zip, id=14843, Manufacturer Part Number 1=5555153-1, Part Number=f401b84a-9695-45b1-951e-00bef0039069
P2: library part b53db51a-1725-412b-9039-fa7a45c7c438, "CONN THT DC JACK 0.5A 30VDC 5Kcycles", Manufacturer 1="HRO Electronics", ComponentLink1Description=Datasheet, ComponentLink1URL="http://localhost:8080/static/files/Korean-Hroparts-Elec-DC-005A-20A_C191049_22019-03-10_214231.486078.pdf?Korean-Hroparts-Elec-DC-005A-20A_C191049 (2).pdf", id=14780, Manufacturer Part Number 1=DC-005A-20A, Part Number=b53db51a-1725-412b-9039-fa7a45c7c438
P3 P4: library part af155709-b835-40ac-b9b5-4a44b0fd2777, "CONN D-SUB HD 15POLES BLACK THT", Manufacturer 1=FCI, ComponentLink1Description="Mechanical Drawing", ComponentLink1URL=http://localhost:8080/static/files/c-cd-00112019-08-16_203054.958624.pdf?c-cd-0011.pdf, ComponentLink2Description=Datasheet, ComponentLink2URL=http://localhost:8080/static/files/io_dsub_highdensity2019-08-16_203112.582695.pdf?io_dsub_highdensity.pdf, id=14838, Manufacturer Part Number 1=ICD15S13E4GV00LF, Part Number=af155709-b835-40ac-b9b5-4a44b0fd2777
P5: library part 3e3c57e9-f1b8-4c12-8bb1-97da9eb9c220, "CONN JACK 3.5MM 4POLE THT", Manufacturer 1=Cliff, ComponentLink1Description=Datasheet, ComponentLink1URL=http://localhost:8080/static/files/Cliff-FC68125-datasheet2019-08-17_161810.238588.pdf?Cliff-FC68125-datasheet.pdf, id=14844, Manufacturer Part Number 1=FC68125, Part Number=3e3c57e9-f1b8-4c12-8bb1-97da9eb9c220
P6: library part 44088476-53fa-4578-a611-1fd63affe7b4, "CONN THERMOCOUPLE K-TYPE THT", Manufacturer 1=Labfacility, ComponentLink1Description=Datasheet, ComponentLink1URL=http://localhost:8080/static/files/28420972019-08-17_162400.037613.pdf?2842097.pdf, id=14845, Manufacturer Part Number 1=IM-K-PCB, Part Number=44088476-53fa-4578-a611-1fd63affe7b4
P7: library part 8565bfd1-7a71-455a-a363-4ce9dda60de6, "CONN DC 3 POLE 15A PCB MALE", Manufacturer 1="Changzhou Amass Elec", ComponentLink1Description=Datasheet, ComponentLink1URL="http://localhost:8080/static/files/MR30PW_SPEC2019-08-16_190138.191607.pdf?MR30PW SPEC.pdf", ComponentLink2Description="3D Model", ComponentLink2URL=http://localhost:8080/static/files/B3F23392-877C-4EEC-B1AF-B260E8D921532019-08-16_190154.620416.step?B3F23392-877C-4EEC-B1AF-B260E8D92153.step, id=14833, Manufacturer Part Number 1=MR30PW-M, Part Number=8565bfd1-7a71-455a-a363-4ce9dda60de6
R2 R7 R9 R10 R22: library part 6ae227f9-847f-4766-8522-e11a83531204, "RES SMD 0 OHM 5% 1/10W 0603", Manufacturer 1=Yageo, Manufacturer Part Number 1=RC0603JR-070RL, id=11973, Part Number=6ae227f9-847f-4766-8522-e11a83531204
R3 R6: library part 90164141-8820-4471-9a6f-9a984ce9068c, "POT TRIMMER LINEAR 50K 25TURNS VERT THT", Manufacturer 1=Bourns, Manufacturer Part Number 1=3296W-1-503LF, ComponentLink1Description=Datasheet, ComponentLink1URL="http://localhost:8080/static/files/BOURNS-3296W-1-103LF_C34846_12019-08-17_221926.713297.pdf?BOURNS-3296W-1-103LF_C34846 (1).pdf", id=14849, Part Number=90164141-8820-4471-9a6f-9a984ce9068c
R5: library part 613f65ed-4d8d-44d0-9fe5-67eff78392c9, "POT TRIMMER LINEAR 10K 25TURNS VERT THT", Manufacturer 1=Bourns, Manufacturer Part Number 1=3296W-1-103LF, ComponentLink1Description="3D Model", ComponentLink1URL="http://localhost:8080/static/files/3296W_v12019-08-17_171307.552870.step?3296W v1.step", ComponentLink2Description=Datasheet, ComponentLink2URL=http://localhost:8080/static/files/BOURNS-3296W-1-103LF_C348462019-08-17_171320.734450.pdf?BOURNS-3296W-1-103LF_C34846.pdf, id=14847, Part Number=613f65ed-4d8d-44d0-9fe5-67eff78392c9
R11 R12 R13 R14 R15 R16 R17 R18 R25 R34 R41 R42 R43 R44 R46 R47 R54 R55 R56 R57 R60 R61: library part 93242766-ba1d-462d-b58f-ce1dfc4129c8, "RES SMD 10K OHM 1% 1/10W 0603", Manufacturer 1=Yageo, Manufacturer Part Number 1=RC0603FR-0710KL, id=12101, Part Number=93242766-ba1d-462d-b58f-ce1dfc4129c8
R19 R26 R29 R30 R36 R39: library part a678220f-9e9d-4863-a833-9993504f723c, "RES SMD 1K OHM 1% 1/10W 0603", Manufacturer 1=Yageo, Manufacturer Part Number 1=RC0603FR-071KL, id=14794, Part Number=a678220f-9e9d-4863-a833-9993504f723c
R24 R32: library part f0166db1-b7e4-4c18-9511-2907615c1c51, "RES SMD 10 OHM 0.1% 1/16W 25ppm  0603", Manufacturer 1=Uniroyal, Manufacturer 2="Viking Tech", Manufacturer Part Number 1=TC0325B100JT5E, Manufacturer Part Number 2=AR03BTCX0100, id=14842, Part Number=f0166db1-b7e4-4c18-9511-2907615c1c51
R31: library part 3df905ea-1e80-4add-859d-a36edd7f106c, "POT 10K 20% SHAFT 6mmx7.4mm LIN", Manufacturer 1=ALPS, Manufacturer Part Number 1=RK09K1130A6S, ComponentLink1Description="3D Model", ComponentLink1URL=http://localhost:8080/static/files/RK09K1130A6S2019-08-17_031625.830758.zip?RK09K1130A6S.zip, ComponentLink2Description=Datasheet, ComponentLink2URL=http://localhost:8080/static/files/ALPS-Electric-RK09K1130A6S_C2097702019-08-17_031651.036431.pdf?ALPS-Electric-RK09K1130A6S_C209770.pdf, id=14828, Part Number=3df905ea-1e80-4add-859d-a36edd7f106c
U1 U2 U4 U5 U7 U8 U10 U14 U16 U17 U19 U20 U22 U24 U26 U28 U33: library part 5610e9ea-bca8-49b2-8e5f-11409231f6a4, "IC OPAMP 65uV 1pA RRIO 5V 80mA SOT-23-5", Manufacturer 1="Analog Devices", ComponentLink1Description=Datasheet, ComponentLink1URL=http://localhost:8080/static/files/Analog_Devices-AD8605ARTZ-REEL7-datasheet2019-08-16_175825.352099.pdf?Analog_Devices-AD8605ARTZ-REEL7-datasheet.pdf, id=14830, Manufacturer Part Number 1=AD8605ARTZ, Part Number=5610e9ea-bca8-49b2-8e5f-11409231f6a4
U3 U6 U9 U23: library part 59fe82cd-fd18-4813-9f52-e2e78a460aff, "IC PGA G0-4094 SPI-PARALLEL 5V RRIO SSOP-16", Manufacturer 1="Analog Devices", ComponentLink1Description=Datasheet, ComponentLink1URL=http://localhost:8080/static/files/Linear_Technology-LTC6915CDEPBF-datasheet2019-08-16_194420.284095.pdf?Linear_Technology-LTC6915CDE#PBF-datasheet.pdf, id=14835, Manufacturer Part Number 1=LTC6915CGN#PBF, Part Number=59fe82cd-fd18-4813-9f52-e2e78a460aff
U11 U12 U25 U29: library part bbf157ad-cd7a-4e82-97e3-d6a037590888, "SWITCH ROTARY HEX/BCD 16 POSITIONS", Manufacturer 1=Omron, ComponentLink1Description=Datasheet, ComponentLink1URL=http://localhost:8080/static/files/A6R-A6RV2019-08-16_190638.241287.PDF?A6R-A6RV.PDF, ComponentLink2Description="3D Model", ComponentLink2URL=http://localhost:8080/static/files/2599C238-5645-4A8C-8BF9-C7515FACCFA02019-08-16_192704.487115.step?2599C238-5645-4A8C-8BF9-C7515FACCFA0.step, id=14834, Manufacturer Part Number 1=A6R-162RS, Part Number=bbf157ad-cd7a-4e82-97e3-d6a037590888
U13: library part 446536aa-1bdd-4764-8cae-49f4e0c126ff, "IC SMD LINEAR VOLTAGE REGULATOR 5V 500mA DPAK/TO-252", Manufacturer 1="ST Microelectronics", ComponentLink1Description=Datasheet, ComponentLink1URL=http://localhost:8080/static/files/STMicroelectronics-L78M05ABDT-TR_C580692019-08-17_184424.026041.pdf?STMicroelectronics-L78M05ABDT-TR_C58069.pdf, id=14848, Manufacturer Part Number 1=L78M05ABDT-TR, Part Number=446536aa-1bdd-4764-8cae-49f4e0c126ff
U15: library part 0de0df07-6dfd-42d8-9fe7-171c27772811, "IC VOLTAGE REF SERIES 2.5V 75ppm 0.2% SOT-23", Manufacturer 1="Texas Instruments", ComponentLink1Description=Datasheet, ComponentLink1URL=http://localhost:8080/static/files/Texas-Instruments-TI-REF3025AIDBZR_C113342019-08-16_180357.548624.pdf?Texas-Instruments-TI-REF3025AIDBZR_C11334.pdf, id=14831, Manufacturer Part Number 1=REF3025AIDBZR, Part Number=0de0df07-6dfd-42d8-9fe7-171c27772811
U18 U21 U30 U31: library part 3a318f0a-3b94-47d9-91d5-8fc0a2f410e8, "MOSFET N-CHANNEL LOGIC LEVEL 300mA 3ohm 60V ESD-PROT 2N7002K SOT-23", Manufacturer 1="ON Semiconductor", Manufacturer 2=Vishay, Manufacturer 3="Diodes Inc.", Manufacturer Part Number 1=2N7002KT1G, Manufacturer Part Number 2=2N7002K-T1-GE3, Manufacturer Part Number 3=2N7002K-7, ComponentLink1Description=Datasheet, ComponentLink1URL=http://localhost:8080/static/files/ON-Semicon-ON-2N7002KT1G_C1165842019-08-17_164859.682835.pdf?ON-Semicon-ON-2N7002KT1G_C116584.pdf, ComponentLink2Description=Datasheet, ComponentLink2URL=http://localhost:8080/static/files/Vishay-Intertech-2N7002K-T1-GE3_C814452019-08-17_164907.199439.pdf?Vishay-Intertech-2N7002K-T1-GE3_C81445.pdf, ComponentLink3Description=Datasheet, ComponentLink3URL=http://localhost:8080/static/files/DATA, id=14846, Part Number=3a318f0a-3b94-47d9-91d5-8fc0a2f410e8
U27: library part 8cc7f909-42c7-4251-909a-43740f41a1ca, "IC THERMOCOUPLE AMPLIFIER MSOP-8", Manufacturer 1="Analog Devices", ComponentLink1Description=Datasheet, ComponentLink1URL=http://localhost:8080/static/files/Analog-Devices-ADI-AD8495ARMZ-R7_C596582019-08-16_182304.166986.pdf?Analog-Devices-ADI-AD8495ARMZ-R7_C59658.pdf, id=14832, Manufacturer Part Number 1=AD8495ARMZ-R7, Part Number=8cc7f909-42c7-4251-909a-43740f41a1ca
U32: library part 22da43c7-1950-42f4-bc93-10d9cca79b4d, "IC LOGIC PORT CONFIGURABLE AND, OR, NAND, NOR, XOR, BUFFER, NOT 8ns  74XX58 SC-70", Manufacturer 1="ON Semiconductor", Manufacturer 2="Texas Instruments", Manufacturer Part Number 2=SN74LVC1G58DCKR, ComponentLink1Description=Datasheet, ComponentLink1URL=http://localhost:8080/static/files/1812220431_ON-Semicon-ON-NC7SZ58P6X_C2328042019-08-17_005741.293796.pdf?1812220431_ON-Semicon-ON-NC7SZ58P6X_C232804.pdf, ComponentLink2Description=Datasheet, ComponentLink2URL=http://localhost:8080/static/files/Texas-Instruments-TI-SN74LVC1G58DCKR_C78422019-08-17_005749.189474.pdf?Texas-Instruments-TI-SN74LVC1G58DCKR_C7842.pdf, id=14841, Manufacturer Part Number 1=NC7SZ58P6X, Part Number=22da43c7-1950-42f4-bc93-10d9cca79b4d
U34: library part d16ab88a-2543-469a-8940-7b800b633548, "IC SMD TIMER NE555 SOIC-8", Manufacturer 1="Texas Instruments", ComponentLink1Description=Datasheet, ComponentLink1URL="http://localhost:8080/static/files/Texas-Instruments-TI-NE555DR_C7593_22019-03-10_221020.033506.pdf?Texas-Instruments-TI-NE555DR_C7593 (2).pdf", id=14787, Manufacturer Part Number 1=NE555DR, Part Number=d16ab88a-2543-469a-8940-7b800b633548

## Nets (pads, with @x,y where several pads share a name; then routed paths per layer and width w, separated by ;. In a path a pad name is that pad's centre, name@x,y a point inside that pad or via, vN(x,y) a via of type N, cw(c..) or ccw(c..) an arc to the next point about the centre after c; other vN are vias at no path point)
+2.50: R36.2 U3.13 U6.3 U6.13 U9.13 U14.1 U14.4 U23.13 U27.2
+5: C6.1 C7.1 C8.1 C12.2 C15.1 R24.2 R60.2 U1.5 U2.5 U3.11 U3.16 U4.5 U5.5 U6.11 U6.16 U7.5 U8.5 U9.11 U9.16 U10.5 U11.C U12.C U13.3 U14.5 U15.1 U16.5 U17.5 U19.5 U20.5 U22.5 U23.11 U23.16 U24.5 U25.C U26.5 U27.7 U28.5 U32.3 U32.5 U33.5 U34.8
+12: C2.1 C3.1 C4.1 C5.1 D8.1 D9.1 K1.C K1.L1 K2.L1 L2.2 U13.1
GAUSS_I_N: P5.1 U24.4
GAUSS_I_P: P5.6
GAUSS_V_N: P5.3 U23.3
GAUSS_V_P: P5.2 U23.2
GND: C1.2 C2.2 C3.2 C4.2 C5.2 C6.2 C7.2 C8.2 C9.2 C11.2 C14.1 C15.2 C16.1 D1.2 D2.2 D3.2 D4.2 D5.2 D6.2 D7.2 P1.9 P1.10 P2.2 P2.3 P3.5 P3.6 P3.7 P3.8 P3.10 P3.16 P3.17 P4.5 P4.6 P4.7 P4.8 P4.10 P4.16 P4.17 P7.2 R11.1 R12.1 R13.1 R14.1 R15.1 R16.1 R17.1 R18.1 R19.1 R26.1 R31.3 R32.1 R34.1 R39.1 R41.1 R42.1 R43.1 R44.1 R54.1 R55.1 R56.1 R57.1 U1.2 U2.2 U3.1 U3.4 U3.5 U3.10 U4.2 U5.2 U6.1 U6.4 U6.5 U6.10 U7.2 U8.2 U9.1 U9.4 U9.5 U9.10 U10.2 U13.4 U14.2 U15.3 U16.2 U17.2 U19.2 U20.2 U21.2 U22.2 U23.1 U23.4 U23.5 U23.10 U24.2 U26.2 U27.3 U28.2 U30.2 U31.2 U32.2 U33.2 U34.1
HEATER1: K1.NO K2.C P7.1
HEATER2: K2.NO P7.3
HOT: U33.1 U34.4
NetC1_1: C1.1 L1.2 L2.1
NetC9_1: C9.1 R19.2 U14.3 U15.2 U16.3
NetC10_1: C10.1 R22.2 R32.2 U18.2 U19.3
NetC10_2: C10.2 U20.1
NetC11_1: C11.1 R30.2 U20.3
NetC12_1: C12.1 C13.2 R46.1 U27.8
NetC13_1: C13.1 C14.2 R47.1 U27.1
NetC16_2: C16.2 R61.1 U34.2 U34.6
NetD8_2: D8.2 K1.L2 U30.3
NetD9_2: D9.2 K2.L2 U31.3
NetL1_1: L1.1 P2.1
NetP6_1: P6.1 R46.2
NetP6_2: P6.2 R47.2
NetR1_1: U1.1 U1.4
NetR2_2: R2.2 U2.1 U2.4 U3.2
NetR3_2: R3.2 R3.3 R5.3
NetR4_1: U4.1 U4.4
NetR5_1: R5.1 R6.1
NetR5_2: R5.2 U6.2
NetR7_2: R7.2 U3.3 U5.1 U5.4
NetR8_1: U7.1 U7.4
NetR9_2: R9.2 U8.1 U8.4 U9.2
NetR10_2: R10.2 U9.3 U10.1 U10.4
NetR11_2: R11.2 U3.6 U9.6 U11.1
NetR12_2: R12.2 U3.7 U9.7 U11.2
NetR13_2: R13.2 U3.8 U9.8 U11.4
NetR14_2: R14.2 U3.9 U9.9 U11.8
NetR15_2: R15.2 U6.6 U12.1
NetR16_2: R16.2 U6.7 U12.2
NetR17_2: R17.2 U6.8 U12.4
NetR18_2: R18.2 U6.9 U12.8
NetR20_1: U16.1 U16.4
NetR21_1: R26.2 U19.4
NetR21_2: U19.1
NetR22_1: R22.1 U20.4
NetR23_1: R25.2
NetR25_1: R25.1 R31.1
NetR28_2: U18.1
NetR29_1: R29.1 U17.1 U17.4
NetR29_2: R29.2 R30.1 U21.3
NetR31_2: R31.2 U17.3
NetR33_2: R34.2 U21.1
NetR35_1: U22.1 U22.4
NetR36_1: R36.1 R39.2 U24.3
NetR37_1: U24.1
NetR37_2: 
NetR41_2: R41.2 U23.6 U25.1
NetR42_2: R42.2 U23.7 U25.2
NetR43_2: R43.2 U23.8 U25.4
NetR44_2: R44.2 U23.9 U25.8
NetR45_1: U26.1 U26.4
NetR49_1: U28.3
NetR52_1: R57.2 U29.8 U32.6
NetR52_2: R54.2 U30.1
NetR53_1: U32.4
NetR53_2: R55.2 U31.1
NetR56_2: R56.2 U29.4 U32.1
NetR58_1: U33.4
NetR60_1: R60.1 R61.2 U34.7
NetU4_3: U4.3 U6.14 U6.15
NetU22_3: U22.3 U23.14 U23.15
NetU26_3: U26.3 U27.5 U27.6 U28.4 U33.3
NOT_OVERTEMP: U28.1 U29.C
OUT_GAUSS: D6.1
OUT_IGEN: D5.1
OUT_REF_P: D4.1
OUT_TEMP: D7.1
OUT_VH: D2.1
OUT_VH1: D1.1
OUT_VH2: D3.1
SAMPLE_I_N: P1.8 U18.3
SAMPLE_I_P: P1.7 R24.1
SAMPLE_VH1_N: P1.4 R7.1 U5.3
SAMPLE_VH1_P: P1.3 R2.1 U2.3
SAMPLE_VH2_N: P1.6 R10.1 U10.3
SAMPLE_VH2_P: P1.5 R9.1 U8.3
SAMPLE_VR_N: P1.2
SAMPLE_VR_P: P1.1
VH1: R3.1 U1.3 U3.14 U3.15
VH2: R6.2 R6.3 U7.3 U9.14 U9.15
pads on no net: FD1.5 FD2.5 FD3.5 K1.NC K2.NC P1. P3.1 P3.2 P3.3 P3.4 P3.9 P3.11 P3.12 P3.13 P3.14 P3.15 P4.1 P4.2 P4.3 P4.4 P4.9 P4.11 P4.12 P4.13 P4.14 P4.15 P5. P6.NC P7.0 R31.4 U3.12 U6.12 U9.12 U23.12 U27.4 U29.1 U29.2 U34.3 U34.5

## Text inside footprints (layer, text, board x,y; h text height)
GR1: Top Overlay "FAIL" at 109.5,45.5 h2.03 r90; Top Overlay "PASS" at 105.5,45.5 h2.03 r90